# EAGLE board PCB_Proiect_v283 (EAGLE 9.7.0)
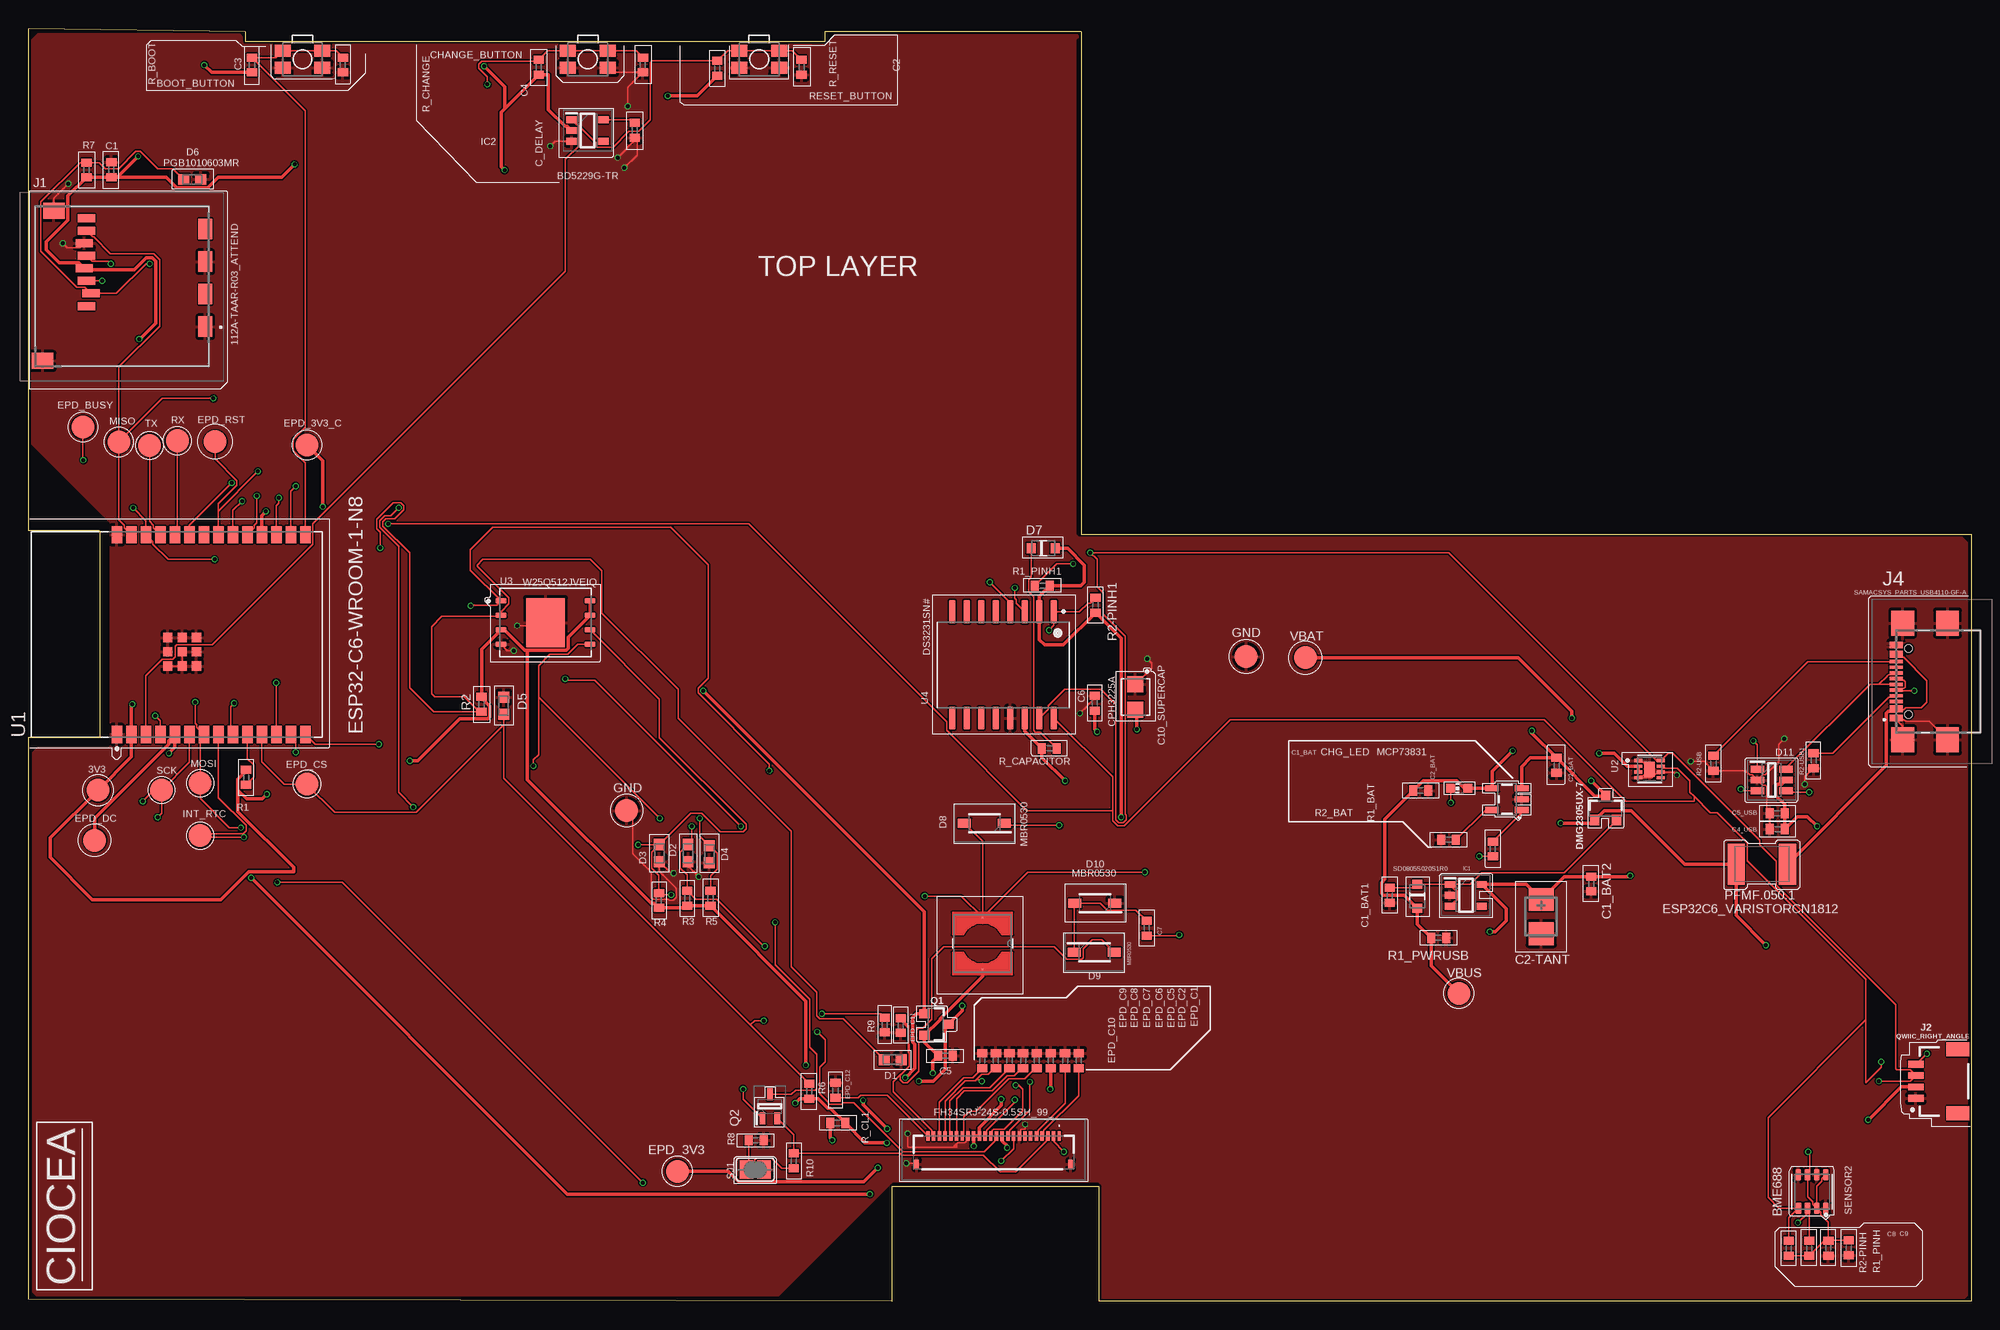
[diagram p0: board, top side]
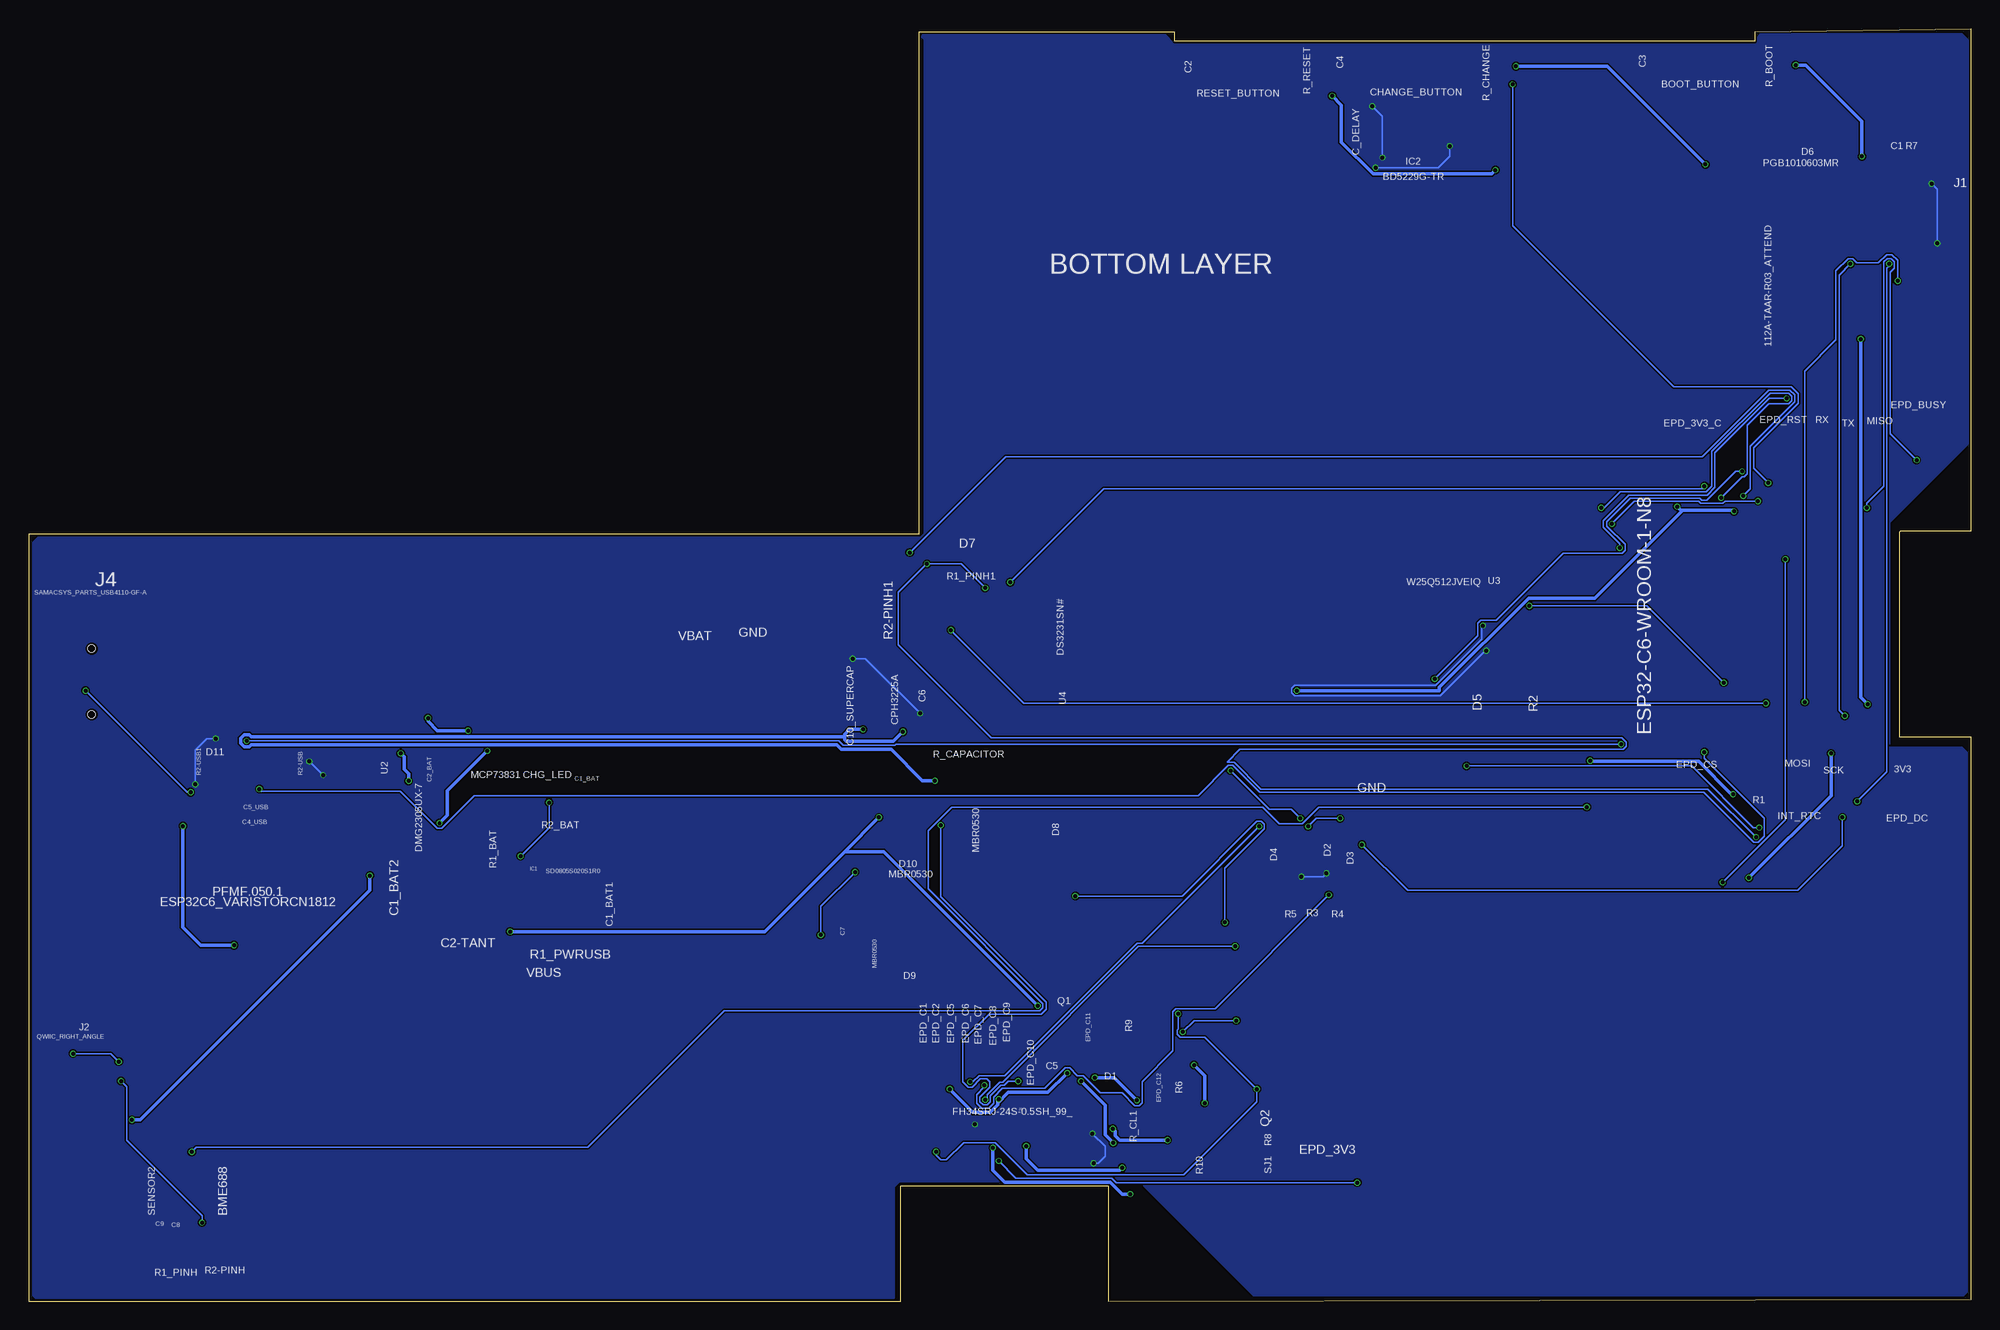
[diagram p1: board, bottom side, seen from below]

Size 170.2 x 111.5 mm. Coordinates in mm from the lower left corner, seen from the top.
Outline: 92.2,111.2 69.8,111.2 69.8,110.4 19,110.4 19,111.2 0,111.5 0,67.5 6.2,67.5 6.3,67.4 6.3,49.4 0,49.4 0,0.2 75.6,0 75.6,10.1 93.8,10.1 93.8,0 170.2,0 170.2,67.2 92.2,67.2 92.2,111.2
Copper layers (1*16): Top 0.035mm / dielectric 1.6mm / Bottom 0.035mm
Design rules "jlcpcb-2layers.dru": minimum track width 5mil, minimum drill 0.3mm, track to track 5mil, track to pad 5mil, pad to pad 5mil, via to via 5mil, smd to smd 5mil, copper to edge 0.2mm, drill to drill 6mil, minimum pad ring 10mil, minimum via ring 3mil, stop-mask expansion 4mil, vias tented up to drill 0mil, thermal gap 10mil

## Footprints (pad centres in the part's own frame; a part is rotated, then mirrored left to right if it is on the bottom)
MYBUTTON = smd 1.4 x 1.05: 1 1.75,0.75; 2 -1.75,0.75; 3 -1.75,-0.75; 4 1.75,-0.75
EAGLE-LTSPICE_C0402 = smd 0.7 x 0.9: 1 -0.65,0; 2 0.65,0
RCL_CT3528 = smd 2 x 2.2: + -1.5,0; - 1.5,0
CAPCP3225X100N = smd 1.4 x 1.4: 1 -1.1,0; 2 1.1,0
ADAFRUIT_CHIP-LED0603 = smd 0.8 x 0.8: A 0,-0.75; C 0,0.75
DIOC1608X36N = smd 0.97 x 0.94: 1 -0.75,0; 2 0.75,0
ESP32_WROVER_AVX---SD0805S020S1R0_AVX_SD0805S020S1R0_0 = smd 0.8 x 0.9: 1 -1.05,0; 2 1.05,0
SOD3716X135N = smd 1.15 x 0.8: 1 -1.75,0; 2 1.75,0
SOT95P280X145-6N = smd 1.2 x 0.6: 1 -1.25,0.95; 2 -1.25,0; 3 -1.25,-0.95; 4 1.25,-0.95; 5 1.25,0; 6 1.25,0.95
ESP32_WROVER_SPARKFUN-DISCRETESEMI_SOT23-3 = smd 0.8 x 0.9: 1 -0.95,-1; 2 0.95,-1; 3 0,1.1
SOT95P280X120-5N = smd 0.9 x 0.6: 1 -1.4,0.95; 2 -1.4,0; 3 -1.4,-0.95; 4 1.4,-0.95; 5 1.4,0.95
SOT95P280X125-5N = smd 0.9 x 0.6: 1 -1.4,0.95; 2 -1.4,0; 3 -1.4,-0.95; 4 1.4,-0.95; 5 1.4,0.95
112ATAARR03ATTEND = smd 1.8 x 1.2: G1 10.6,10.4; G2 4.9,10.4; S1 7.75,10.4; S2 2.05,10.4 | smd 1.4 x 1.9: G3 13.6,-3.85; G4 0.45,-2.85 | smd 0.7 x 1.5: P1 8.8,0; P2 7.7,0.4; P3 6.6,0; P4 5.5,-0.2; P5 4.4,0; P6 3.3,-0.2; P7 2.2,0; P8 1.1,0
JST04_1MM_RA = smd 0.6 x 1.35: 1 -1.5,0; 2 -0.5,0; 3 0.5,0; 4 1.5,0 | smd 1.2 x 2: NC1 2.8,-3.675; NC2 -2.8,-3.675
FH34SRJ24S05SH99 = smd 0.3 x 0.8: 1 5.75,1.45; 2 5.25,1.45; 3 4.75,1.45; 4 4.25,1.45; 5 3.75,1.45; 6 3.25,1.45; 7 2.75,1.45; 8 2.25,1.45; 9 1.75,1.45; 10 1.25,1.45; 11 0.75,1.45; 12 0.25,1.45; 13 -0.25,1.45; 14 -0.75,1.45; 15 -1.25,1.45; 16 -1.75,1.45; 17 -2.25,1.45; 18 -2.75,1.45; 19 -3.25,1.45; 20 -3.75,1.45; 21 -4.25,1.45; 22 -4.75,1.45; 23 -5.25,1.45; 24 -5.75,1.45 | smd 0.4 x 0.8: MP1 6.75,-1.05; MP2 -6.75,-1.05
SAMACSYS_PARTS_USB4110GFA = smd 0.3 x 1.15: A1 -3.35,3.678; A4 -2.55,3.678; A5 -1.25,3.678; A6 -0.25,3.678; A7 0.25,3.678; A8 1.25,3.678; A9 2.55,3.678; A12 3.35,3.678; B1 3.05,3.678; B4 2.25,3.678; B5 1.75,3.678; B6 0.75,3.678; B7 -0.75,3.678; B8 -1.75,3.678; B9 -2.25,3.678; B12 -3.05,3.678 | smd 2.18 x 2: MP1 -5.11,-0.827; MP2 5.11,-0.827; MP3 -5.11,3.103; MP4 5.11,3.103 | hole 0.65: -2.89,2.603; 2.89,2.603
IND_4828-WE-TPC_WRE = smd 0.127 x 0.127: 1 -2.286,0; 2 2.286,0
ESP32_WROVER_SPARKFUN-IC-POWER_SOT23-5 = smd 0.55 x 1.2: 1 -0.95,-1.3; 2 0,-1.3; 3 0.95,-1.3; 4 0.95,1.3; 5 -0.95,1.3
ESP32C6_VARISTOR_CT/CN1812 = smd 1.5 x 3.6: 1 -2.25,0; 2 2.25,0
SOT65P210X110-3N = smd 1.05 x 0.5: 1 -1.05,0.65; 2 -1.05,-0.65; 3 1.05,0
ESP32_WROVER_EAGLE-LTSPICE_R0402 = smd 0.7 x 0.9: 1 -0.65,0; 2 0.65,0
ESP32_WROVER_BME680_PSON80P300X300X100-8N = smd 1.016 x 0.5: 1 1.458,1.2; 2 1.458,0.4; 3 1.458,-0.4; 4 1.458,-1.2; 5 -1.458,-1.22; 6 -1.458,-0.4; 7 -1.458,0.4; 8 -1.458,1.2
SJ = smd 1.168 x 1.6: 1 -0.762,0; 2 0.762,0
TP20R = smd 2 x 2: TP 0,0
XCVR_ESP32-C6-WROOM-1-N8 = smd 1.5 x 0.9: 1 -8.75,5.26; 2 -8.75,3.99; 3 -8.75,2.72; 4 -8.75,1.45; 5 -8.75,0.18; 6 -8.75,-1.09; 7 -8.75,-2.36; 8 -8.75,-3.63; 9 -8.75,-4.9; 10 -8.75,-6.17; 11 -8.75,-7.44; 12 -8.75,-8.71; 13 -8.75,-9.98; 14 -8.75,-11.25; 15 8.75,-11.25; 16 8.75,-9.98; 17 8.75,-8.71; 18 8.75,-7.44; 19 8.75,-6.17; 20 8.75,-4.9; 21 8.75,-3.63; 22 8.75,-2.36; 23 8.75,-1.09; 24 8.75,0.18; 25 8.75,1.45; 26 8.75,2.72; 27 8.75,3.99; 28 8.75,5.26 | smd 0.8 x 0.8: 29_1 -2.755,0.79; 29_2 -1.505,0.79; 29_3 -0.255,0.79; 29_4 -2.755,-0.46; 29_5 -1.505,-0.46; 29_6 -0.255,-0.46; 29_7 -2.755,-1.71; 29_8 -1.505,-1.71; 29_9 -0.255,-1.71
SON50P200X200X80-9N = smd 0.76 x 0.27: 1 -0.985,0.75; 2 -0.985,0.25; 3 -0.985,-0.25; 4 -0.985,-0.75; 5 0.985,-0.75; 6 0.985,-0.25; 7 0.985,0.25; 8 0.985,0.75 | smd 0.9 x 1.3: 9 0,0
SON127P600X800X80-9N = smd 0.94 x 0.44: 1 -3.895,1.905; 2 -3.895,0.635; 3 -3.895,-0.635; 4 -3.895,-1.905; 5 3.895,-1.905; 6 3.895,-0.635; 7 3.895,0.635; 8 3.895,1.905 | smd 3.4 x 4.3: 9 0,0
SOIC127P1032X265-16N = smd 2.05 x 0.59: 1 -4.655,4.445; 2 -4.655,3.175; 3 -4.655,1.905; 4 -4.655,0.635; 5 -4.655,-0.635; 6 -4.655,-1.905; 7 -4.655,-3.175; 8 -4.655,-4.445; 9 4.655,-4.445; 10 4.655,-3.175; 11 4.655,-1.905; 12 4.655,-0.635; 13 4.655,0.635; 14 4.655,1.905; 15 4.655,3.175; 16 4.655,4.445

## Placement (x,y rotation side)
BOOT_BUTTON  BUTTON_CUSYOMV1  [MYBUTTON]  24,108.81 180 top
C1  100nF  [EAGLE-LTSPICE_C0402]  7.26,99.13 90 top
C1_BAT  4.7uF  [EAGLE-LTSPICE_C0402]  121.95,44.75 0 top
C1_BAT1  4.7uF  [EAGLE-LTSPICE_C0402]  119.25,35.57 270 top
C1_BAT2  4.7uF  [EAGLE-LTSPICE_C0402]  136.89,36.56 270 top
C2  1uF  [EAGLE-LTSPICE_C0402]  67.72,108.11 270 top
C2-TANT  100uF TANT  [RCL_CT3528]  132.51,33.7 270 top
C2_BAT  4.7uF  [EAGLE-LTSPICE_C0402]  133.86,46.95 270 top
C3  100nF  [EAGLE-LTSPICE_C0402]  27.54,108.31 270 top
C4  100nF  [EAGLE-LTSPICE_C0402]  53.82,108.31 270 top
C4_USB  100nF  [EAGLE-LTSPICE_C0402]  153.2,41.37 180 top
C5  10uF  [EAGLE-LTSPICE_C0402]  80.32,21.51 0 top
C5_USB  4.7uF  [EAGLE-LTSPICE_C0402]  153.18,42.75 180 top
C6  100nF  [EAGLE-LTSPICE_C0402]  93.4,52.41 90 top
C7  4.7uF/25V  [EAGLE-LTSPICE_C0402]  97.95,32.69 270 top
C8  100nF  [EAGLE-LTSPICE_C0402]  157.67,4.66 270 top
C9  100nF  [EAGLE-LTSPICE_C0402]  159.46,4.69 270 top
C10_SUPERCAP  CPH3225A  [CAPCP3225X100N]  96.96,52.94 270 top
C_DELAY  100nF  [EAGLE-LTSPICE_C0402]  53.11,102.59 270 top
CHANGE_BUTTON  BUTTON_CUSYOMV1  [MYBUTTON]  49,108.81 180 top
CHG_LED  [ADAFRUIT_CHIP-LED0603]  125.34,44.94 90 top
D1  PGB1010603MR  [DIOC1608X36N]  75.7,21.17 180 top
D2  PGB1010603MR  [DIOC1608X36N]  57.78,39.27 90 top
D3  PGB1010603MR  [DIOC1608X36N]  55.26,39.27 90 top
D4  PGB1010603MR  [DIOC1608X36N]  59.64,39.17 90 top
D5  PGB1010603MR  [DIOC1608X36N]  41.62,52.17 270 top
D6  PGB1010603MR  [DIOC1608X36N]  14.35,98.28 180 top
D7  SD0805S020S1R0  [ESP32_WROVER_AVX---SD0805S020S1R0_AVX_SD0805S020S1R0_0]  88.89,65.98 0 top
D8  MBR0530  [SOD3716X135N]  83.73,41.88 180 top
D9  MBR0530  [SOD3716X135N]  93.37,30.58 0 top
D10  MBR0530  [SOD3716X135N]  93.41,34.88 180 top
D11  USBLC6-2SC6Y  [SOT95P280X145-6N]  152.7,45.67 0 top
DMG2305UX-7  20V/4.2A/52mΩ/1.4W  [ESP32_WROVER_SPARKFUN-DISCRETESEMI_SOT23-3]  138.16,43.16 0 top
EPD_C1  1uF/50V  [EAGLE-LTSPICE_C0402]  91.99,21.09 90 top
EPD_C2  1uF/50V  [EAGLE-LTSPICE_C0402]  90.8,21.09 90 top
EPD_C5  0.1uF/50V  [EAGLE-LTSPICE_C0402]  89.55,21.09 90 top
EPD_C6  1uF/50V  [EAGLE-LTSPICE_C0402]  88.31,21.09 90 top
EPD_C7  1uF/50V  [EAGLE-LTSPICE_C0402]  87.12,21.09 90 top
EPD_C8  1uF/50V  [EAGLE-LTSPICE_C0402]  85.93,21.09 90 top
EPD_C9  1uF/50V  [EAGLE-LTSPICE_C0402]  84.74,21.09 90 top
EPD_C10  1uF/50V  [EAGLE-LTSPICE_C0402]  83.55,21.09 90 top
EPD_C11  1uF/50V  [EAGLE-LTSPICE_C0402]  76.41,24.17 270 top
EPD_C12  1uF/50V  [EAGLE-LTSPICE_C0402]  70.69,18.49 90 top
IC1  XC6220A331MR-G  [SOT95P280X120-5N]  125.91,35.57 0 top
IC2  BD5229G-TR  [SOT95P280X125-5N]  48.97,102.57 0 top
J1  112A-TAAR-R03_ATTEND  [112ATAARR03ATTEND]  5.08,95.99 270 top
J2  QWIIC_RIGHT_ANGLE  [JST04_1MM_RA]  165.32,19.28 90 top
J3  FH34SRJ-24S-0.5SH_99_  [FH34SRJ24S05SH99]  84.54,13.04 0 top
J4  SAMACSYS_PARTS_USB4110-GF-A  [SAMACSYS_PARTS_USB4110GFA]  167.28,54.3 90 top
L1  68uH  [IND_4828-WE-TPC_WRE]  83.57,31.35 270 top
MCP73831  ESP32_WROVER_SPARKFUN-IC-POWER_MCP73831  [ESP32_WROVER_SPARKFUN-IC-POWER_SOT23-5]  129.51,43.99 90 top
PFMF.050.1  ESP32C6_VARISTORCN1812  [ESP32C6_VARISTOR_CT/CN1812]  151.84,38.3 180 top
Q1  20V/4.2A/52mΩ/1.4W  [ESP32_WROVER_SPARKFUN-DISCRETESEMI_SOT23-3]  79.48,24.26 270 top
Q2  SI1308EDL-T1-GE3  [SOT65P210X110-3N]  64.94,17.08 90 top
R1  10K  [ESP32_WROVER_EAGLE-LTSPICE_R0402]  19.06,45.91 270 top
R1_BAT  200  [ESP32_WROVER_EAGLE-LTSPICE_R0402]  128.28,39.63 270 top
R1_PINH  10K  [ESP32_WROVER_EAGLE-LTSPICE_R0402]  155.99,4.65 270 top
R1_PINH1  10K  [ESP32_WROVER_EAGLE-LTSPICE_R0402]  88.81,62.69 0 top
R1_PWRUSB  100K  [ESP32_WROVER_EAGLE-LTSPICE_R0402]  123.52,31.84 180 top
R2  10K  [ESP32_WROVER_EAGLE-LTSPICE_R0402]  39.68,52.31 90 top
R2-PINH  10K  [ESP32_WROVER_EAGLE-LTSPICE_R0402]  154.19,4.65 270 top
R2-PINH1  10K  [ESP32_WROVER_EAGLE-LTSPICE_R0402]  93.47,60.99 90 top
R2-USB  5k1  [ESP32_WROVER_EAGLE-LTSPICE_R0402]  147.6,47.13 270 top
R2-USB1  5k1  [ESP32_WROVER_EAGLE-LTSPICE_R0402]  156.37,47.37 90 top
R2_BAT  2K  [ESP32_WROVER_EAGLE-LTSPICE_R0402]  124.39,40.43 0 top
R3  10K  [ESP32_WROVER_EAGLE-LTSPICE_R0402]  57.7,35.31 270 top
R4  10K  [ESP32_WROVER_EAGLE-LTSPICE_R0402]  55.22,35.11 270 top
R5  10K  [ESP32_WROVER_EAGLE-LTSPICE_R0402]  59.74,35.31 270 top
R6  10K  [ESP32_WROVER_EAGLE-LTSPICE_R0402]  68.39,18.41 270 top
R7  10K  [ESP32_WROVER_EAGLE-LTSPICE_R0402]  5.08,99.11 270 top
R8  2.2  [ESP32_WROVER_EAGLE-LTSPICE_R0402]  63.74,14.11 180 top
R9  10K  [ESP32_WROVER_EAGLE-LTSPICE_R0402]  75,24.21 270 top
R10  0.47  [ESP32_WROVER_EAGLE-LTSPICE_R0402]  67.04,12.31 270 top
R_BOOT  10K  [ESP32_WROVER_EAGLE-LTSPICE_R0402]  19.58,108.31 90 top
R_CAPACITOR  15  [ESP32_WROVER_EAGLE-LTSPICE_R0402]  89.42,48.44 0 top
R_CHANGE  10K  [ESP32_WROVER_EAGLE-LTSPICE_R0402]  44.69,108.11 90 top
R_CL1  10K  [ESP32_WROVER_EAGLE-LTSPICE_R0402]  70.88,15.63 180 top
R_RESET  10K  [ESP32_WROVER_EAGLE-LTSPICE_R0402]  60.33,108.01 90 top
RESET_BUTTON  BUTTON_CUSYOMV1  [MYBUTTON]  64,108.81 180 top
SD0805S020S1R0  ESP32_WROVER_AVX---SD0805S020S1R0_AVX_SD0805S020S1R0_0_0AVX_SD0805S020S1R0_0_0  [ESP32_WROVER_AVX---SD0805S020S1R0_AVX_SD0805S020S1R0_0]  121.66,35.48 270 top
SENSOR2  BME688  [ESP32_WROVER_BME680_PSON80P300X300X100-8N]  156.24,9.62 270 top
SJ1  [SJ]  63.66,11.54 180 top
TP1  TX  [TP20R]  10.61,74.99 0 top
TP2  RX  [TP20R]  13.03,75.39 0 top
TP3  VBAT  [TP20R]  111.85,56.39 0 top
TP4  GND  [TP20R]  106.67,56.49 0 top
TP5  GND  [TP20R]  52.39,42.99 0 top
TP6  MISO  [TP20R]  7.91,75.29 0 top
TP7  MOSI  [TP20R]  15.03,45.39 0 top
TP8  SCK  [TP20R]  11.65,44.79 0 top
TP9  EPD_BUSY  [TP20R]  4.77,76.59 0 top
TP10  EPD_CS  [TP20R]  24.39,45.31 0 top
TP11  EPD_DC  [TP20R]  5.79,40.39 0 top
TP12  EPD_RST  [TP20R]  16.34,75.31 0 top
TP13  EPD_3V3_C  [TP20R]  24.39,75.01 0 top
TP14  VBUS  [TP20R]  125.29,26.99 0 top
TP15  INT_RTC  [TP20R]  15.04,40.79 0 top
TP16  3V3  [TP20R]  6.09,44.79 0 top
TP17  EPD_3V3  [TP20R]  56.84,11.39 0 top
U1  ESP32-C6-WROOM-1-N8  [XCVR_ESP32-C6-WROOM-1-N8]  13,58.41 90 top
U2  MAX17048G+T10  [SON50P200X200X80-9N]  142,46.62 0 top
U3  W25Q512JVEIQ  [SON127P600X800X80-9N]  45.29,59.46 0 top
U4  DS3231SN#  [SOIC127P1032X265-16N]  85.37,55.75 270 top

## Library data of the parts
BOOT_BUTTON CHANGE_BUTTON CHG_LED PFMF.050.1 RESET_BUTTON SJ1 TP1-TP17 = DeskAssistant v19 v1
C1 C1_BAT C1_BAT1 C1_BAT2 C2 C2_BAT C3 C4 C4_USB C5 C5_USB C6-C9 C_DELAY EPD_C1 EPD_C2 EPD_C5-EPD_C12 = DeskAssistant v19 v1; SPICEMODEL: NONE; SPICEPREFIX: C
C2-TANT = DeskAssistant v19 v1; SPICEPREFIX: C
C10_SUPERCAP = DeskAssistant v19 v1; AVAILABILITY: Not in stock; CHECK_PRICES: https://www.snapeda.com/parts/CPH3225A/Seiko+Instruments/view-part/?ref=eda; DESCRIPTION: 11 mF (EDLC) Supercapacitor 3.3 V 1210 (3225 Metric) - -; MF: Seiko Instruments; MP: CPH3225A; PACKAGE: 1210 Seiko; PRICE: None; PURCHASE-URL: https://www.snapeda.com/api/url_track_click_mouser/?unipart_id=562593&manufacturer=Seiko Instruments&part_name=CPH3225A&search_term=None; SNAPEDA_LINK: https://www.snapeda.com/parts/CPH3225A/Seiko+Instruments/view-part/?ref=snap
D1-D6 = DeskAssistant v19 v1; AVAILABILITY: In Stock; CHECK_PRICES: https://www.snapeda.com/parts/PGB1010603MR/Littelfuse/view-part/?ref=eda; DESCRIPTION: 150V (Typ) Clamp - Ipp Tvs Diode Surface Mount 0603 (1608 Metric); MF: Littelfuse Inc.; MP: PGB1010603MR; PACKAGE: 0603 Littelfuse Inc.; PRICE: None; PURCHASE-URL: https://www.snapeda.com/api/url_track_click_mouser/?unipart_id=5659453&manufacturer=Littelfuse Inc.&part_name=PGB1010603MR&search_term=None; SNAPEDA_LINK: https://www.snapeda.com/parts/PGB1010603MR/Littelfuse/view-part/?ref=snap
D7 SD0805S020S1R0 = DeskAssistant v19 v1; CENTROID_NOT_SPECIFIED: No; DATASHEET: http://datasheets.avx.com/schottky.pdf; DIGIKEY_DESCRIPTION: DIODE SCHOTTKY 20V 1A 0805; DIGIKEY_PART_NUMBER: 478-7800-1-ND; LEAD_FREE: yes; MF: AVX; MOUSER_PART_NUMBER: 581-SD0805S020S1R0; PACKAGE: 0805 (2012 metric); PREFIX: D; ROHS: yes; TEMPERATURE_RANGE_HIGH: +125°C; TEMPERATURE_RANGE_LOW: -55°C
D8-D10 = DeskAssistant v19 v1; AVAILABILITY: In Stock; CHECK_PRICES: https://www.snapeda.com/parts/MBR0530/Onsemi/view-part/?ref=eda; DESCRIPTION: Diode Schottky 30 V 500mA Surface Mount SOD-123; MF: ON Semiconductor; MP: MBR0530; PACKAGE: SOD-123-2 ON Semiconductor; PRICE: None; PURCHASE-URL: https://www.snapeda.com/api/url_track_click_mouser/?unipart_id=179458&manufacturer=ON Semiconductor&part_name=MBR0530&search_term=None; SNAPEDA_LINK: https://www.snapeda.com/parts/MBR0530/Onsemi/view-part/?ref=snap
D11 = DeskAssistant v19 v1; AVAILABILITY: In Stock; CHECK_PRICES: https://www.snapeda.com/parts/USBLC6-2SC6Y/STMicroelectronics/view-part/?ref=eda; DESCRIPTION: 17V Clamp 5A (8/20µs) Ipp Tvs Diode Surface Mount SOT-23-6; MF: STMicroelectronics; MP: USBLC6-2SC6Y; PACKAGE: SOT-23-6 STMicroelectronics; PRICE: None; SNAPEDA_LINK: https://www.snapeda.com/parts/USBLC6-2SC6Y/STMicroelectronics/view-part/?ref=snap
DMG2305UX-7 Q1 = DeskAssistant v19 v1; PROD_ID: TRAN-14388
IC1 = DeskAssistant v19 v1; DESCRIPTION: LDO Voltage Regulators; HEIGHT: 1.2mm; MANUFACTURER_NAME: Torex; MANUFACTURER_PART_NUMBER: XC6220A331MR-G; MOUSER_PART_NUMBER: 865-XC6220A331MR-G; MOUSER_PRICE-STOCK: https://www.mouser.co.uk/ProductDetail/Torex-Semiconductor/XC6220A331MR-G?qs=AsjdqWjXhJ8ZSWznL1J0gg%3D%3D
IC2 = DeskAssistant v19 v1; DESCRIPTION: Voltage Detector with Adjustable Delay Time: CMOS processes are utilized to develop high precision, low current consumption CMOS reset ICs that allow arbitrary setting of the delay time. The extensive lineup includes both Nch Open Drain and CMOS output types in a wide range of detection voltages (from 2.3V to 6.0V, in 0.1V steps), enabling selection of the ideal solution based on customer requirements. In addition, the entire series is of course both lead-free and RoHS-compliant.; HEIGHT: 1.25mm; MANUFACTURER_NAME: ROHM Semiconductor; MANUFACTURER_PART_NUMBER: BD5229G-TR; MOUSER_PART_NUMBER: 755-BD5229G-TR; MOUSER_PRICE-STOCK: https://www.mouser.co.uk/ProductDetail/ROHM-Semiconductor/BD5229G-TR?qs=4kLU8WoGk0vvnhrrYwdszw%3D%3D
J1 = DeskAssistant v19 v1; DESCRIPTION: Micro SD Card Socket, Push-Push Type, Top Mount, SMT, H=1.83mm, 10u; HEIGHT: 1.9mm; MANUFACTURER_NAME: ATTEND; MANUFACTURER_PART_NUMBER: 112A-TAAR-R03 ATTEND
J2 = DeskAssistant v19 v1; PROD_ID: CONN-13694
J3 = DeskAssistant v19 v1; DESCRIPTION: 24 Position FFC, FPC Connector Contacts, Top and Bottom 0.020" (0.50mm) Surface Mount, Right Angle; HEIGHT: 1.1mm; MANUFACTURER_NAME: Hirose; MANUFACTURER_PART_NUMBER: FH34SRJ-24S-0.5SH(99); MOUSER_PART_NUMBER: 798-FH34SRJ24S05SH99; MOUSER_PRICE-STOCK: https://www.mouser.co.uk/ProductDetail/Hirose-Connector/FH34SRJ-24S-0.5SH99?qs=vcbW%252B4%252BSTIpKBl5ap9J8Fw%3D%3D
J4 = DeskAssistant v19 v1; DESCRIPTION: CONN USB 2.0 TYPE-C R/A SMT; HEIGHT: 3.26mm; MANUFACTURER_NAME: GCT (GLOBAL CONNECTOR TECHNOLOGY); MANUFACTURER_PART_NUMBER: USB4110-GF-A; MOUSER_PART_NUMBER: 640-USB4110-GF-A; MOUSER_PRICE-STOCK: https://www.mouser.co.uk/ProductDetail/GCT/USB4110-GF-A?qs=KUoIvG%2F9IlYiZvIXQjyJeA%3D%3D
L1 = DeskAssistant v19 v1; COPYRIGHT: Copyright (C) 2024 Ultra Librarian. All rights reserved.; MANUFACTURER_PART_NUMBER: 744043680; MFR_NAME: Wurth Electronics
MCP73831 = DeskAssistant v19 v1; PROD_ID: IC-09995
Q2 = DeskAssistant v19 v1; AVAILABILITY: In Stock; CHECK_PRICES: https://www.snapeda.com/parts/SI1308EDL-T1-GE3/Vishay+Siliconix/view-part/?ref=eda; DESCRIPTION: Si1308EDL-T1-GE3 N-channel MOSFET Transistor, 1.5 A, 30 V, 3-Pin SC-70 | Siliconix / Vishay SI1308EDL-T1-GE3; MF: Vishay Siliconix; MP: SI1308EDL-T1-GE3; PACKAGE: SOT-323 Vishay Semiconductor; PRICE: None; PURCHASE-URL: https://www.snapeda.com/api/url_track_click_mouser/?unipart_id=274603&manufacturer=Vishay Siliconix&part_name=SI1308EDL-T1-GE3&search_term=None; SNAPEDA_LINK: https://www.snapeda.com/parts/SI1308EDL-T1-GE3/Vishay+Siliconix/view-part/?ref=snap
R1 R1_BAT R1_PINH R1_PINH1 R1_PWRUSB R2 R2-PINH R2-PINH1 R2-USB R2-USB1 R2_BAT R3-R10 R_BOOT R_CAPACITOR R_CHANGE R_CL1 R_RESET = DeskAssistant v19 v1; SPICEMODEL: NONE; SPICEPREFIX: R
SENSOR2 = DeskAssistant v19 v1; AVAILABILITY: Unavailable; DESCRIPTION: Integrated Environmental Unit; MF: Bosch Sensortec; MP: BME680; PACKAGE: LGA-8 Bosch Tools; PRICE: None
U1 = DeskAssistant v19 v1; AVAILABILITY: In Stock; CHECK_PRICES: https://www.snapeda.com/parts/ESP32-C6-WROOM-1-N8/Espressif+Systems/view-part/?ref=eda; DESCRIPTION: Multiprotocol Modules ESP32-C6 module, Wi-Fi 6 in 2.4 GHz band, Bluetooth 5, Zigbee 3.0 and Thread. ESP34-WROOM Compatible - ENGINEERING SAMPLE; MF: Espressif Systems; MP: ESP32-C6-WROOM-1-N8; PACKAGE: None; PRICE: None; SNAPEDA_LINK: https://www.snapeda.com/parts/ESP32-C6-WROOM-1-N8/Espressif+Systems/view-part/?ref=snap
U2 = DeskAssistant v19 v1; AVAILABILITY: In Stock; CHECK_PRICES: https://www.snapeda.com/parts/MAX17048G+T10/Analog+Devices/view-part/?ref=eda; DESCRIPTION: 3µA 1-Cell/2-Cell Fuel Gauge with ModelGauge; MF: Analog Devices; MP: MAX17048G+T10; PACKAGE: TDFN-8 Maxim; PRICE: None; PURCHASE-URL: https://www.snapeda.com/api/url_track_click_mouser/?unipart_id=329239&manufacturer=Analog Devices&part_name=MAX17048G+T10&search_term=None; SNAPEDA_LINK: https://www.snapeda.com/parts/MAX17048G+T10/Analog+Devices/view-part/?ref=snap
U3 = DeskAssistant v19 v1; AVAILABILITY: In Stock; CHECK_PRICES: https://www.snapeda.com/parts/W25Q512JVEIQ/Winbond+Electronics/view-part/?ref=eda; DESCRIPTION: FLASH - NOR Memory IC 512Mb (64M x 8) SPI - Quad I/O 133 MHz 8-WSON (8x6); MF: Winbond Electronics; MP: W25Q512JVEIQ; PACKAGE: Package; PRICE: None; SNAPEDA_LINK: https://www.snapeda.com/parts/W25Q512JVEIQ/Winbond+Electronics/view-part/?ref=snap
U4 = DeskAssistant v19 v1; AVAILABILITY: In Stock; CHECK_PRICES: https://www.snapeda.com/parts/DS3231SN%23/Analog+Devices/view-part/?ref=eda; DESCRIPTION: Extremely Accurate I²C-Integrated RTC/TCXO/Crystal; MF: Analog Devices; MP: DS3231SN#; PACKAGE: SOIC-16 Maxim; PRICE: None; PURCHASE-URL: https://www.snapeda.com/api/url_track_click_mouser/?unipart_id=99048&manufacturer=Analog Devices&part_name=DS3231SN#&search_term=None; SNAPEDA_LINK: https://www.snapeda.com/parts/DS3231SN%23/Analog+Devices/view-part/?ref=snap

## Nets
3V3: C1.1 C1_BAT2.1 C2-TANT.+ D7.2 IC1.5 IC2.2 J1.P4 J2.2 Q1.3 R1.1 R1_PINH1.2 R2-PINH1.1 R2.2 R3.2 R4.2 R5.2 R6.2 R7.2 R_BOOT.1 R_CHANGE.1 R_CL1.1 R_RESET.1 TP16.TP U1.2 U3.3 U3.7 U3.8 U4.2
32KHZ: R2-PINH1.2 U1.9 U4.1
DN: D11.4 J4.A7 J4.B7
DP: D11.6 J4.A6 J4.B6
EPD_3V3: C5.1 EPD_C5.1 J3.15 J3.16 L1.2 Q1.2 TP17.TP
EPD_3V3_C: Q1.1 R_CL1.2 TP13.TP U1.18
EPD_BUSY: J3.9 TP9.TP U1.26
EPD_CS: D5.2 J3.12 R6.1 TP10.TP U1.11
EPD_DC: J3.11 TP11.TP U1.5
EPD_RST: J3.10 TP12.TP U1.21
FLASH_CS: D4.2 R5.1 U1.12 U3.1
GDR: J3.2 Q2.1 R9.1
GND: BOOT_BUTTON.1 BOOT_BUTTON.2 C1.2 C1_BAT1.2 C1_BAT2.2 C1_BAT.2 C2-TANT.- C2.2 C2_BAT.2 C3.2 C4.2 C4_USB.2 C5.2 C5_USB.2 C6.2 C8.2 C9.2 C10_SUPERCAP.1 C_DELAY.2 CHANGE_BUTTON.1 CHANGE_BUTTON.2 D1.1 D2.1 D3.1 D4.1 D5.1 D6.1 D10.1 D11.2 EPD_C1.2 EPD_C2.2 EPD_C5.2 EPD_C6.2 EPD_C7.2 EPD_C8.2 EPD_C9.2 EPD_C10.2 EPD_C11.2 EPD_C12.2 IC1.2 IC2.3 J1.G1 J1.G2 J1.G3 J1.G4 J1.P6 J2.1 J3.8 J3.17 J3.MP1 J3.MP2 J4.A1 J4.A12 J4.B1 J4.B12 J4.MP1 J4.MP2 J4.MP3 J4.MP4 MCP73831.2 R1_PWRUSB.1 R2-USB1.1 R2-USB.2 R2_BAT.1 R8.1 R9.2 RESET_BUTTON.1 RESET_BUTTON.2 SENSOR2.1 SENSOR2.5 SENSOR2.7 SJ1.1 TP4.TP TP5.TP U1.1 U1.28 U1.29_1 U1.29_2 U1.29_3 U1.29_4 U1.29_5 U1.29_6 U1.29_7 U1.29_8 U1.29_9 U2.1 U2.4 U2.6 U2.9 U3.4 U3.9 U4.13
GPIO8: R1.2 U1.10
I2C_PW: C8.1 C9.1 R1_PINH.2 R2-PINH.2 SENSOR2.2 SENSOR2.6 SENSOR2.8 U1.17
INT_RTC: R1_PINH1.1 TP15.TP U1.8 U4.3
IO/BOOT: BOOT_BUTTON.3 BOOT_BUTTON.4 C3.1 R_BOOT.2 U1.15
IO/CHANGE: C4.1 CHANGE_BUTTON.3 CHANGE_BUTTON.4 R_CHANGE.2 U1.23
MISO: D1.2 J1.P7 R2.1 TP6.TP U1.27 U3.2
MOSI: D2.2 J1.P3 J3.14 R3.1 TP7.TP U1.7 U3.5
N$1: CHG_LED.C R1_BAT.2
N$2: D7.1 R_CAPACITOR.2
N$3: C_DELAY.1 IC2.5
N$4: C1_BAT1.1 DMG2305UX-7.2 IC1.1 IC1.3 SD0805S020S1R0.1
N$5: MCP73831.5 R2_BAT.2
N$6: MCP73831.1 R1_BAT.1
N$7: EPD_C12.1 J3.24
N$8: EPD_C7.1 J3.19
N$9: EPD_C1.1 J3.4
N$10: EPD_C2.1 J3.5
N$11: EPD_C10.1 J3.22
N$12: EPD_C8.1 J3.20
N$14: C7.1 D9.1 D10.2
N$15: J4.B5 R2-USB.1
N$17: J4.A5 R2-USB1.2
N$19: EPD_C6.1 J3.18
PREVGH: D8.1 EPD_C9.1 J3.21
PREVGL: D9.2 EPD_C11.1 J3.23
RESE: J3.3 Q2.2 R10.1
RESE': R8.2 R10.2 SJ1.2
RESET: C2.1 IC2.1 R_RESET.2 RESET_BUTTON.3 RESET_BUTTON.4 U1.3
RTC_RST: U1.16 U4.4
RX: TP2.TP U1.24
SCK: D3.2 J1.P5 J3.13 R4.1 TP8.TP U1.6 U3.6
SCL: J2.4 R2-PINH.1 SENSOR2.4 U1.20 U2.7 U4.16
SDA: J2.3 R1_PINH.1 SENSOR2.3 U1.19 U2.8 U4.15
SRC: C7.2 D8.2 L1.1 Q2.3
SS_SD: D6.2 J1.P2 R7.1 U1.4
TX: TP1.TP U1.25
USB_D+: D11.1 U1.14
USB_D-: D11.3 U1.13
VBAT: C2_BAT.1 DMG2305UX-7.3 MCP73831.3 TP3.TP U2.2 U2.3
VBUS: C1_BAT.1 C4_USB.1 C5_USB.1 CHG_LED.A D11.5 DMG2305UX-7.1 MCP73831.4 PFMF.050.1.2 R1_PWRUSB.2 SD0805S020S1R0.2 TP14.TP
VRTC: C6.1 C10_SUPERCAP.2 R_CAPACITOR.1 U4.14
VUSB: J4.A4 J4.A9 J4.B4 J4.B9 PFMF.050.1.1

## Tracks (layer width: path | path; a pad name or v marks a point on that pad's centre or on a via)
3V3  (via drill 0.35)
  Top 0.3: v140.3,37.3 140.21,37.21 C1_BAT2.1 134.52,37.21 C2-TANT.+ 131.19,36.52 IC1.5 129.44,34.39 129.44,33.34 128.5,32.4 v128,32.4 | D7.2 91.02,65.98 92.5,64.5 92.5,63 92.19,62.69 R1_PINH1.2 88.55,61.77 U4.2 88.55,57.95 89,57.5 90.63,57.5 R2-PINH1.1 95.7,58.11 v95.7,42.4 | U3.8 U3.7 47.27,58.18 47.27,57.2 47.1,57.03 43.7,57.03 | v9.1,52.3 9.01,52.21 U1.2 9.01,47.71 TP16.TP 1.9,40.6 1.9,38.9 5.6,35.2 16.85,35.2 19.28,37.63 23.23,37.63 23.23,38.01 18.33,42.91 18.33,44.79 | R7.2 7.24,98.46 C1.1 7.78,98.48 v9.6,100.3 | R_BOOT.1 16.04,107.66 v15.4,108.3 | IC2.2 47.2,102.94 47.01,102.94 45.54,104.41 45.54,107.46 R_CHANGE.1 41.7,104.47 | R_RESET.1 58.57,105.6 v56,105.6 | v41.7,99.1 41.4,99.4 41.4,104.17 41.7,104.47 | v81.8,25.9 81.8,25.48 Q1.3 80.3,23.98 80.3,20.35 79.25,19.3 v78,19.3 | 18.33,44.79 19.09,44.03 20.49,44.03 v20.88,44.42 | 18.33,44.79 18.33,45.72 19.06,46.45 R1.1 | v68.1,20.7 68.1,26.3 R5.2 R3.2 57.5,34.46 R4.2 54.83,34.85 54.54,34.85 43.7,45.69 43.7,57.03 | R7.2 3.45,96.83 3.45,94.72 1.55,92.82 1.55,92.12 2.71,90.96 4.4,90.96 J1.P4 5,90.37 9.27,90.37 10.33,91.43 10.82,91.43 11.13,91.12 11.13,85.68 9.75,84.3 v9.7,84.3 | v23.3,99.6 22.16,98.46 16.63,98.46 15.7,97.53 13,97.53 12.07,98.46 R7.2 | v39.9,108.2 41.7,106.4 41.7,104.47 | 43.7,57.03 43.48,57.03 41.68,58.83 U3.3 39.68,57.11 R2.2 39.68,52.85 40.41,52.12 40.41,51.2 40.24,51.03 37.75,51.03 34.07,47.35 v33.4,47.35 | v75.18,13.88 75.16,13.9 73.26,13.9 R_CL1.1 70.23,16.93 70.01,16.93 69.18,17.76 R6.2 67.56,17.76 v67.17,17.37 | v161.15,15.9 161.19,15.9 164.07,18.78 J2.2
  Bottom 0.3: v140.3,37.3 140.3,36 160.4,15.9 v161.15,15.9 | v9.1,52.3 9.7,52.9 v9.7,84.3 | v15.4,108.3 14.5,108.3 9.6,103.4 v9.6,100.3 | v128,32.4 105.7,32.4 98.7,39.4 | 98.7,39.4 v95.7,42.4 | 98.7,39.4 95.3,39.4 v81.8,25.9 | v78,19.3 75.9,17.2 75.9,14.6 v75.18,13.88 | v23.3,99.6 31.9,108.2 v39.9,108.2 | v56,105.6 55.2,104.8 55.2,101.55 52.42,98.77 42.03,98.77 v41.7,99.1 | v33.4,47.35 33.35,47.3 23.9,47.3 21.02,44.42 v20.88,44.42 | v68.1,20.7 67.17,19.77 v67.17,17.37
32KHZ  (via drill 0.35)
  Top 0.152: v89.4,58.8 89.81,59.22 U4.1 92.05,60.41 92.82,61.17 93,61.17 R2-PINH1.2 | v18,52.4 17.7,52.1 17.7,49.86 U1.9
  Bottom 0.152: v89.4,58.8 83,52.4 v18,52.4
DN  (via drill 0.35)
  Top 0.152: J4.A7 163.75,54.4 164.26,54.4 164.38,54.28 164.38,53.82 164.26,53.7 163.75,53.7 J4.B7 163.65,53.5 v165.2,53.5 | v156,44.6 154.07,44.6 D11.4
  Bottom 0.152: v165.2,53.5 156.3,44.6 v156,44.6
DP
  Top 0.152: J4.A6 162.1,54.05 | 162.1,54.05 161.31,54.05 153.95,46.69 D11.6 | J4.B6 163.46,54.9 162.94,54.9 162.82,54.78 162.82,54.77 162.1,54.05
EPD_3V3  (via drill 0.35)
  Top 0.3: v79.2,20 79.2,21.04 C5.1 78.48,22.7 Q1.2 79.85,24.68 79.85,24.77 83.57,28.49 L1.2 | EPD_C5.1 89.55,18.65 v89.5,18.6 | TP17.TP 61.27,11.39 62.2,10.46 73.16,10.46 v74.4,11.7 | v82.8,13.6 v82.79,13.61 J3.16 J3.15 83.26,14.52 83.26,15.23 85.21,17.18 v85.21,17.7
  Bottom 0.3: v79.2,20 80.9,18.3 84.37,18.3 85.31,17.36 | 85.31,17.36 85.31,17.22 85.95,16.59 87.48,16.59 v89.5,18.6 | v85.21,17.7 85.31,17.6 85.31,17.36 | v82.8,13.6 82.8,12.5 81.8,11.5 77.63,11.5 77.63,11.47 76.37,11.47 76.37,11.5 74.6,11.5 v74.4,11.7
EPD_3V3_C  (via drill 0.35)
  Top 0.152: 76.82,19.6 v76.8,19.6
  Top 0.3: v20.8,69.2 20.44,68.84 U1.18 | TP13.TP 25.78,73.62 v25.78,69.62 | 76.82,19.6 77.64,20.42 77.64,22.51 77.47,22.68 77.47,24.9 77.78,25.21 Q1.1 78.48,34.12 v59.1,53.5 | v73.1,17.6 73.1,17.24 v75.22,15.12 | v70.42,14.12 70.23,14.31 R_CL1.2
  Bottom 0.3: v20.8,69.2 20.9,69.3 25.3,69.3 | v25.78,69.62 25.46,69.3 25.3,69.3 | v76.8,19.6 75.1,19.6 v73.1,17.6 | 25.3,69.3 33,61.6 38.8,61.6 46.6,53.8 46.6,53.5 v59.1,53.5 | v75.22,15.12 75,14.9 75,14.5 74.62,14.12 v70.42,14.12
EPD_BUSY  (via drill 0.35)
  Top 0.152: TP9.TP 4.77,73.73 v4.8,73.7 | v9.17,69.5 10.28,68.39 U1.26 10.9,66.54 10.9,66.33 12.22,65 v16.3,65 | v21.8,36.7 27.5,36.7 v53.8,10.4 | v85.2,12.3 86.29,13.39 J3.9
  Bottom 0.152: v4.8,73.7 7.12,76.02 7.12,90.14 6.75,90.51 6.75,91.08 7.02,91.35 7.39,91.35 7.68,91.06 7.68,71.42 9.17,69.93 v9.17,69.5 | v16.3,65 16.3,42.2 v21.8,36.7 | v53.8,10.4 74.91,10.4 75.31,10.8 83.7,10.8 v85.2,12.3
EPD_CS  (via drill 0.35)
  Top 0.152: U1.11 20.44,47.26 22.39,45.31 TP10.TP 24.39,45.27 26.81,42.85 33.95,42.85 41.62,50.52 D5.2 41.62,45.83 63.22,24.22 | 63.22,24.22 R6.1 | J3.12 84.64,14.34 84.64,14.01 83.74,13.1 76.6,13.1 72.3,17.4 71.34,17.4 71.22,17.29 70.16,17.29 70.04,17.41 70.04,17.46 69.3,18.2 69.3,18.49 69.32,18.51 69.32,20.52 69.8,21 69.8,22.9 v69.1,23.6 | v64.4,24.6 63.6,24.6 63.22,24.22
  Bottom 0.152: v69.1,23.6 68.1,24.6 v64.4,24.6
EPD_DC  (via drill 0.35)
  Top 0.3: TP11.TP 5.79,42.31 12.28,48.8 12.28,49.12 U1.5 12.82,48.52 v12.3,48 | v19.5,37.1 47.2,9.4 v73.7,9.4 | J3.11 85.29,14.05 85.72,13.62 v85.72,13.46
  Bottom 0.3: v12.3,48 12.3,44.3 v19.5,37.1 | v73.7,9.4 74.41,9.4 75.45,10.45 84.7,10.45 85.73,11.48 v85.73,13.45 v85.72,13.46
EPD_RST  (via drill 0.35)
  Top 0.152: J3.10 85.94,14.64 85.94,14.97 87.7,16.74 87.7,19.21 v87.72,19.23 | v62.4,41.6 49.6,54.4 47.14,54.4 v47.02,54.52 | v20.1,72.7 16.63,69.23 U1.21 16.63,69.89 18.25,71.51 18.25,71.89 16.34,73.8 TP12.TP
  Bottom 0.152: v47.02,54.52 43.25,58.29 43.25,59.39 42.99,59.65 41.65,59.65 35.75,65.55 30.61,65.55 30.35,65.81 30.35,66.3 31.95,67.91 31.95,68.29 29.89,70.35 23.79,70.35 23.62,70.19 23.18,70.19 20.67,72.7 v20.1,72.7 | v62.4,41.6 72.62,31.38 73.09,31.38 84.7,19.76 86.93,19.76 87.47,19.23 v87.72,19.23
FLASH_CS  (via drill 0.35)
  Top 0.152: R5.1 59.74,37.28 60.31,37.85 60.31,39.25 D4.2 58.8,40.76 v58.8,42.3 | U1.12 v21.71,54.19 v21.7,54.2 | v38.73,60.93 38.8,61 41.03,61 U3.1 38.7,64.06 38.7,65.86 40.66,67.82 56.28,67.82 59.55,64.55 59.55,54.6 58.65,53.69 58.65,53.31 64.9,47.06 v64.9,46.5
  Bottom 0.152: v64.9,46.5 61.5,43.1 59.6,43.1 v58.8,42.3 | v21.7,54.2 28.43,60.93 v38.73,60.93
GDR  (via drill 0.35)
  Top 0.152: Q2.1 62.6,17.72 v62.6,18.6 | v69.5,25.2 74.66,25.2 R9.1 | v90.7,13.1 89.79,14.01 J3.2
  Bottom 0.152: v90.7,13.1 90.7,12.8 90.3,12.4 89.8,12.4 88.28,13.92 85.53,13.92 82.7,11.08 69.02,11.08 62.6,17.5 v62.6,18.6 63.95,19.95 67.15,23.15 69.29,23.15 69.55,23.41 69.55,23.79 69.5,23.84 v69.5,25.2
GND  (via drill 0.35)
  Top 0.152: U2.1 141.18,47.21 141.46,47.21 141.6,47.07 141.6,46.17 141.46,46.03 141.18,46.03 U2.4 142.2,45.87 142.54,46.21 142.82,46.21 U2.6 144.13,46.37 v144.4,46.1 | D11.2 151,46.12 150.77,46.12 150.4,46.48 R2-USB.2 146.78,47.3 v145.6,47.3 | J4.A1 164.29,50.95 164.43,50.81 166.49,50.81 J4.MP1 | J4.A1 164.18,50.38 J4.MP3 | U3.4 41.95,57 v42.5,57 | v42.8,59.2 45.03,59.2 U3.9 | v42.5,57 | J1.G4 2.23,96.63 v3.5,97.9 | v3,92.7 3.41,92.29 4.48,92.29 J1.P6 | U1.29_5 U1.29_4 U1.29_1 | J4.B12 J4.A1 | TP5.TP 52.95,42.43 52.95,39.2 54.57,37.58 54.57,35.33 54.69,35.21 56.05,35.21 56.11,35.15 56.49,35.15 56.75,35.41 56.75,36.18 55.26,37.67 D3.1 56.28,37.5 v56.5,37.5 | v52.2,99.3 53.31,100.41 53.31,101.74 C_DELAY.2 53.11,101.71 v51.6,100.2 | v45.7,101.2 46.12,101.62 IC2.3 | CHANGE_BUTTON.2 51.15,107.66 C4.2 52.5,106.34 v52.5,104.7 | D11.2 151.9,45.22 152.13,45.22 152.25,45.1 152.25,43.03 C5_USB.2 152.53,41.39 C4_USB.2 | D11.2 151.9,46.12 152.13,46.12 153.3,47.28 153.3,48.8 v153.8,49.3 | v155.6,45.3 155.6,45.95 R2-USB1.1 | v98,56.3 98.4,55.9 98.4,55.48 C10_SUPERCAP.1 | v92.1,51.5 92.75,52.15 92.75,52.19 93.4,52.84 C6.2 | v58.7,37.2 57.78,38.12 D2.1 | J3.17 82.14,14.34 82.14,14.01 82.02,13.89 81.39,13.89 81.3,13.8 | 81.3,13.8 81.1,13.6 | 81.3,13.8 81.3,13.5 77,13.5 v77,14.7 | v76.9,12.1 77.79,12.1 J3.MP2 | J3.8 86.94,14.49 86.94,15.09 87.3,15.09 v87.3,15.5
  Bottom 0.152: v42.8,59.2 42.9,59.1 42.9,58 46.95,53.95 59.29,53.95 59.55,53.69 59.55,53.31 59.29,53.05 46.55,53.05 42.6,57 v42.5,57 | v3.5,97.9 3,97.4 v3,92.7 | v52.2,99.3 46.7,99.3 45.7,100.3 v45.7,101.2 | v144.4,46.1 v145.6,47.3 | v52.5,104.7 51.6,103.8 v51.6,100.2 | v153.8,49.3 154.6,49.3 155.6,48.3 v155.6,45.3 | v92.1,51.5 96.9,56.3 v98,56.3 | v56.5,37.5 56.8,37.2 v58.7,37.2 | v77,14.7 75.9,13.6 75.9,12.7 76.5,12.1 v76.9,12.1
  pour Top: 93.96,10.24 93.98,10.22 93.98,0.28 169.57,0.28 169.82,0.53 169.82,66.47 169.37,66.92 91.98,66.92 91.96,66.94 91.74,67.16 91.72,67.18 91.72,110.52 91.74,110.54 91.99,110.8 91.77,111.02 70.73,111.02 69.84,110.14 69.82,110.12 18.88,110.12 18.86,110.14 18.84,110.16 18.82,110.18 18.82,110.67 18.47,111.02 0.83,111.02 0.28,110.47 0.28,75.13 7.16,68.24 7.18,68.22 7.18,48.58 7.16,48.56 7.14,48.54 7.12,48.52 0.83,48.52 0.38,48.07 0.38,0.83 0.73,0.48 65.67,0.48 75.66,10.46 75.68,10.48 93.72,10.48 93.74,10.46
  pour Bottom: 94.36,10.04 94.38,10.02 94.38,0.28 169.57,0.28 169.82,0.53 169.82,66.47 169.37,66.92 92.08,66.92 92.06,66.94 91.74,67.26 91.72,67.28 91.72,110.52 91.74,110.54 91.99,110.8 91.77,111.02 70.73,111.02 69.84,110.14 69.82,110.12 18.98,110.12 18.96,110.14 18.84,110.26 18.82,110.28 18.82,110.67 18.47,111.02 0.83,111.02 0.28,110.47 0.28,75.13 7.16,68.24 7.18,68.22 7.18,48.83 7.26,48.74 7.28,48.72 7.28,48.68 7.26,48.66 7.14,48.54 7.12,48.52 0.83,48.52 0.38,48.07 0.38,0.83 0.73,0.48 62.87,0.48 72.86,10.46 72.88,10.48 93.92,10.48 93.94,10.46
GPIO8
  Top 0.152: U1.10 19.17,47.53 19.71,46.99 19.71,45.91 R1.2
I2C_PW  (via drill 0.35)
  Top 0.152: SENSOR2.2 156.99,7.82 156.99,7.61 157.67,6.92 C8.1 | C9.1 157.7,5.34 C8.1 | C8.1 157.3,5.31 R1_PINH.2 R2-PINH.2 | SENSOR2.2 156.29,8.51 156.29,8.72 155.84,9.17 SENSOR2.6 156.04,11.28 156.04,12.96 v155.9,13.1 | SENSOR2.8 157.09,10.73 157.09,10.52 156.64,10.07 SENSOR2.2 | U1.17 21.71,69.71 21.93,69.94 v21.93,70.39 | v33.7,43.3 32.42,44.58 32.42,66.14 30.77,67.8 30.77,68.4 31.2,68.83 31.73,68.83 v32.42,69.52
  Bottom 0.152: v155.9,13.1 155.5,13.5 121.2,13.5 109.25,25.45 81.61,25.45 81.35,25.71 81.35,26.09 91.4,36.14 91.4,41.24 89.34,43.3 62.09,43.3 60.64,41.85 58.61,41.85 57.16,43.3 v33.7,43.3 | v32.42,69.52 32.17,69.52 30.78,70.91 23.25,70.91 22.75,71.41 22.75,74.45 17.64,79.55 16.01,79.55 15.75,79.29 15.75,78.91 16.01,78.65 17.76,78.65 19.65,76.76 19.65,72.51 19.91,72.25 20.08,72.25 v21.93,70.39
INT_RTC  (via drill 0.35)
  Top 0.152: v91.5,64.6 90.07,64.6 R1_PINH1.1 | v86.4,62.5 86.4,61.57 86.5,61.47 86.5,61.18 U4.3 | v18.87,40.67 15.16,40.67 TP15.TP 15.2,40.95 18.79,40.95 19.05,41.21 19.05,41.69 16.63,44.11 U1.8
  Bottom 0.152: v86.4,62.5 88.5,64.6 v91.5,64.6 94,62.1 94,57.5 85.88,49.38 30.64,49.38 30.25,48.99 30.25,48.61 30.51,48.35 64.09,48.35 65.2,47.23 64.6,47.23 62.24,44.88 23.08,44.88 v18.87,40.67
IO/BOOT
  Top 0.152: C3.1 26.94,109.56 BOOT_BUTTON.3 BOOT_BUTTON.4 21.65,108.96 R_BOOT.2 24.25,104.29 24.25,76.57 23.19,75.51 23.19,74.51 24.25,73.45 U1.15
IO/CHANGE  (via drill 0.35)
  Top 0.152: C4.1 53.22,109.56 CHANGE_BUTTON.3 CHANGE_BUTTON.4 45.49,109.56 R_CHANGE.2 44.59,108.65 39.71,108.65 39.45,108.39 39.45,108.01 40.2,107.26 v40.2,106.6 | v17.8,71.7 14.09,67.99 U1.23
  Bottom 0.152: v17.8,71.7 19.09,72.99 19.09,74.78 15.19,78.68 15.19,79.52 15.78,80.11 26.08,80.11 40.2,94.23 v40.2,106.6
MISO  (via drill 0.35)
  Top 0.152: U1.27 8.39,67.78 8.39,67.99 7.91,68.48 TP6.TP | J1.P7 5.62,93.24 5.71,93.24 7.17,91.78 10.96,91.78 11.48,91.27 11.48,85.44 7.91,81.87 TP6.TP | v16.2,79.1 11.72,79.1 TP6.TP | D1.2 71.37,24.75 69.31,24.75 69.05,25.01 69.05,27.07 66.8,29.32 66.8,41.2 56.9,51.1 56.9,53.6 50.2,60.3 50.2,64 49.2,65 39.8,65 39.3,64.5 39.3,64.41 42.07,61.64 42.07,61.09 41.4,60.42 U3.2 41.3,59.99 36.22,59.99 35.33,59.11 35.33,53.24 35.6,52.97 38.17,52.97 39.48,51.66 R2.1 35.48,51.66 33.4,53.74 33.4,65.56 31.05,67.91 31.05,68.29 31.31,68.55 32.1,68.55 32.88,69.33 32.88,69.71 32.61,69.98 31.94,69.98 30.49,68.52 30.49,67.68 30.8,67.37 v30.8,66
  Bottom 0.152: v16.2,79.1 17.7,79.1 22.47,74.33 22.47,71.3 23.13,70.63 30,70.63 32.23,68.4 32.23,67.8 30.8,66.36 v30.8,66
MOSI  (via drill 0.35)
  Top 0.152: v14.6,52.5 14.6,50.64 14.74,50.49 14.74,50.28 U1.7 15.03,49.33 TP7.TP 15.03,44.07 17.6,41.5 v18.6,41.5 | J1.P3 6.46,89.39 v6.47,89.4 | J3.14 83.94,14.64 83.94,14.97 86.4,17.44 v86.4,17.67 | U3.5 48.13,57.55 47.25,56.68 45.68,56.68 44.7,55.7 44.7,52.9 | 44.7,52.9 v55.3,42.3 | v58.1,41.6 58.1,40.34 D2.2 57.11,39.35 57.11,37.95 57.7,37.36 R3.1 58.45,35.21 60.27,35.21 64.39,31.1 v64.5,31.1 | 44.7,52.9 44.7,47.9 44.23,47.43 v44.23,46.9
  Bottom 0.152: v14.6,52.5 14.6,81.5 11.88,84.22 11.88,90.26 10.79,91.35 10.41,91.35 10.04,90.98 8.16,90.98 7.44,91.7 6.97,91.7 6.47,91.2 v6.47,89.4 | v55.3,42.3 57.4,42.3 v58.1,41.6 | v18.6,41.5 19.1,41.5 24.5,46.9 v44.23,46.9 | v64.5,31.1 72.97,31.1 84.86,19.21 85.13,19.21 86.22,18.12 86.22,17.85 v86.4,17.67
N$1  (via drill 0.35)
  Top 0.152: R1_BAT.2 127.12,38.98 v127.1,39 | v124.6,43.7 v124.59,43.71 CHG_LED.C
  Bottom 0.152: v127.1,39 124.6,41.5 v124.6,43.7
N$2
  Top 0.152: R_CAPACITOR.2 88.64,49.87 88.21,49.87 88.05,50.03 88.05,61.72 87.61,62.16 87.61,63.22 87.84,63.45 D7.1
N$3
  Top 0.152: C_DELAY.1 52.83,103.52 IC2.5
N$4
  Top 0.152: C1_BAT1.1 121.35,36.22 SD0805S020S1R0.1 IC1.1 | IC1.3 124.96,35.07 125.04,35.07 125.16,35.19 125.16,35.95 125.04,36.07 124.96,36.07 IC1.1 | IC1.1 126.27,36.52 127.32,37.56 134.51,37.56 DMG2305UX-7.2
N$5
  Top 0.152: R2_BAT.2 127.65,43.04 MCP73831.5
N$6
  Top 0.152: R1_BAT.1 130.81,42.81 MCP73831.1
N$7
  Top 0.152: EPD_C12.1 72.7,17.84 72.91,18.05 75.23,18.05 J3.24
N$8
  Top 0.152: EPD_C7.1 87.02,20.44 86.36,19.78 85.75,19.78 84.42,18.45 81.98,18.45 81.29,17.76 J3.19
N$9
  Top 0.152: J3.4 88.94,14.64 88.94,14.97 91.99,18.03 EPD_C1.1
N$10
  Top 0.152: J3.5 88.44,14.64 88.44,14.97 90.8,17.34 EPD_C2.1
N$11
  Top 0.152: J3.22 79.79,17.45 81.94,19.59 82.7,19.59 EPD_C10.1
N$12
  Top 0.152: J3.20 80.69,14.59 80.69,17.56 81.87,18.73 84.22,18.73 84.59,19.11 EPD_C8.1
N$14
  Top 0.152: D9.1 91.62,34.84 D10.2 93.9,34.88 94.5,34.28 97.01,34.28 C7.1
N$15
  Top 0.152: J4.B5 155.87,56.05 R2-USB.1
N$17
  Top 0.152: J4.A5 163.46,52.9 162.94,52.9 158.06,48.02 R2-USB1.2
N$19
  Top 0.152: J3.18 81.94,14.64 81.94,16.18 82.43,16.67 83.03,16.67 85.86,19.5 87.27,19.5 88.21,20.44 EPD_C6.1
PREVGH  (via drill 0.35)
  Top 0.152: D8.1 85.66,41.7 v90.3,41.7 | 83.01,19.41 83.49,19.89 84.08,19.89 84.64,20.44 EPD_C9.1 | J3.21 80.29,17.55 82.05,19.31 82.91,19.31 83.01,19.41 | 83.01,19.41 83.38,19.41 v83.5,19.29
  Bottom 0.152: v90.3,41.7 90.3,35.44 81.07,26.2 81.07,25.6 81.5,25.17 86.04,25.17 88.35,22.85 88.35,19.22 87.89,18.75 87.55,18.75 86.82,19.48 86.24,19.48 86,19.24 86,18.76 86.85,17.9 86.85,17.48 86.59,17.22 86.21,17.22 85.95,17.48 85.95,18 85.02,18.93 84.74,18.93 84.39,19.29 v83.5,19.29
PREVGL
  Top 0.152: J3.23 79.14,14.64 79.14,14.97 75.76,18.36 75.76,19.24 77.14,20.62 77.14,21.72 77.06,21.8 77.06,23.95 76.41,24.61 EPD_C11.1 77.12,24.11 77.12,22.53 77.14,22.52 77.14,20.58 76.35,19.79 76.35,19.41 76.61,19.15 76.99,19.15 78,20.15 78,22.66 77.83,22.83 77.83,23.79 77.95,23.91 78.32,23.91 79.13,24.73 79.13,30.03 80.18,31.08 89.86,31.08 90.96,29.98 92.28,29.98 92.4,30.1 92.4,30.9 93.18,31.68 94.02,31.68 D9.2
RESE
  Top 0.152: Q2.2 67.04,14.58 R10.1 76.34,12.96 76.48,12.82 83.64,12.82 85.11,11.35 86.48,11.35 89.14,14.01 89.14,14.34 J3.3
RESE'
  Top 0.152: R8.2 63.09,11.73 SJ1.2 63.63,12.28 63.63,12.43 63.75,12.54 65.09,12.54 65.97,11.66 R10.2
RESET
  Top 0.152: C2.1 66.92,109.56 RESET_BUTTON.3 RESET_BUTTON.4 61.23,109.56 R_RESET.2 54.61,108.66 54.47,108.52 54.47,103.52 53.45,102.49 52.58,102.49 51.2,101.12 49.84,101.12 49.72,101.24 49.72,101.46 48.22,102.95 | U1.3 10.28,54.81 11.73,56.26 12.65,56.26 12.86,56.46 12.86,57.39 12.98,57.51 16.09,57.51 24.9,66.33 24.9,68.1 47.02,90.22 47.02,100.04 48.22,101.24 48.22,102.95 | 48.22,102.95 48.1,103.07 48.02,103.07 IC2.1
RTC_RST  (via drill 0.35)
  Top 0.152: U1.16 22.98,70.98 v23.4,71.4 | v84.2,63 86,61.2 U4.4
  Bottom 0.152: v84.2,63 76,71.2 23.6,71.2 v23.4,71.4
RX
  Top 0.152: TP2.TP 13.03,67.37 U1.24
SCK  (via drill 0.35)
  Top 0.152: TP8.TP 14.09,47.23 U1.6 | U3.6 55.26,52.75 55.26,49.38 62.85,41.79 62.85,41.41 62.59,41.15 60.6,41.15 58.99,42.75 57.99,42.75 D3.2 | D3.2 54.59,39.35 54.59,37.95 55.22,37.32 R4.1 55.38,35.6 v56.3,35.6 | TP8.TP 11.65,42.75 v11.3,42.4 | v53.4,40 55.24,40 D3.2 | TP8.TP 10.99,44.79 v10,43.8 | J1.P5 5.57,91.1 7,91.1 v7.2,90.9 | J3.13 84.44,14.64 84.44,14.97 84.56,15.09 85.49,15.09 87.1,16.7 87.1,18.59 86.75,18.94 v86.46,18.94
  Bottom 0.152: v11.3,42.4 11.3,39.9 15.2,36 49.4,36 v53.4,40 | v10,43.8 7.4,46.4 7.4,90.5 7.2,90.7 v7.2,90.9 | v56.3,35.6 66.25,25.65 69.69,25.65 69.95,25.39 69.95,21.95 72.65,19.25 72.65,17.41 72.91,17.15 73.29,17.15 74.4,18.25 76.31,18.25 77.81,19.75 78.31,19.75 79.01,20.45 79.39,20.45 81.19,18.65 84.9,18.65 85.67,17.89 85.67,17.37 86.1,16.94 86.7,16.94 87.13,17.37 87.13,18.12 86.46,18.79 v86.46,18.94
SCL  (via drill 0.35)
  Top 0.152: R2-PINH.1 154.19,7.31 SENSOR2.4 153.34,8.16 152.4,9.1 152.4,16.1 160.95,24.65 | v162.3,21 162.3,20.5 160.95,19.15 160.95,24.65 | 160.95,24.65 160.95,28.2 150.54,38.61 150.54,40.18 147.92,42.81 147.33,42.81 145.9,44.24 | U2.7 143.15,46.71 144.43,46.71 145.53,45.61 145.53,44.61 145.9,44.24 | 145.9,44.24 145.9,43.8 139.9,43.8 132.76,50.94 105.28,50.94 96,41.67 95.4,41.67 94.97,42.1 94.97,43 | U4.16 94.97,45.94 94.97,43 | 94.97,43 87.46,43 80.43,50.03 80.43,50.77 63.1,68.1 v31.5,68.1 | U1.20 17.9,69.3 v18.7,70.1 | J2.4 165.38,20.78 v166.3,21.7
  Bottom 0.152: v162.3,21 163,21.7 v166.3,21.7 | v18.7,70.1 21.58,70.1 21.77,69.91 23.73,69.91 23.9,70.07 29.53,70.07 v31.5,68.1
SDA  (via drill 0.35)
  Top 0.152: R1_PINH.1 155.99,8.01 SENSOR2.3 155.84,7.74 v155,6.9 | 165.33,19.78 164.84,20.28 163.67,20.28 163.56,20.4 163.56,26 153.1,36.45 153.1,38.55 151.66,40 151.66,40.4 144.05,48.01 143.62,48.01 U2.8 142.64,47.37 124.41,65.6 v93,65.6 93.6,65 93.6,62.6 94.12,62.07 94.12,60.19 96.05,58.26 96.05,42.69 96.15,42.59 96.15,42.21 95.89,41.95 95.51,41.95 95.25,42.21 95.25,52.3 93.93,53.61 90.77,53.61 89.32,52.16 89.32,51.87 U4.15 | 165.33,19.78 164.85,19.3 v162.1,19.3 | U1.19 19.79,67.78 19.79,67.99 20,68.21 v20,70.55 | 165.33,19.78 J2.3
  Bottom 0.152: v162.1,19.3 161.6,18.8 161.6,14.1 155,7.5 v155,6.9 | v93,65.6 84.6,74 23.59,74 17.76,79.83 15.9,79.83 15.47,79.4 15.47,78.8 19.37,74.9 19.37,71.19 v20,70.55
SRC  (via drill 0.35)
  Top 0.152: D8.2 83.57,40.29 L1.1 | Q2.3 66.83,18.13 67.21,18.51 68.92,18.51 69.04,18.63 69.04,21.66 68.45,22.25 68.45,26.45 65.4,29.5 v65.4,33.2 | v78.5,35.5 81.71,35.5 L1.1 | C7.2 100.74,32.04 v100.8,32.1 | v97.8,37.6 87.53,37.6 L1.1
  Bottom 0.152: v78.5,35.5 69.14,35.5 62.59,42.05 62.21,42.05 61.95,41.79 61.95,41.41 65.4,37.96 v65.4,33.2 | v100.8,32.1 100.8,34.6 v97.8,37.6
SS_SD  (via drill 0.35)
  Top 0.152: D6.2 12.65,99.23 11.32,99.23 9.79,100.75 9.41,100.75 7.88,99.23 6.73,99.23 6.19,99.76 R7.1 4.51,99.76 1.07,96.32 1.07,92.01 4.24,88.84 4.93,88.84 J1.P2 7.69,88.29 10.3,90.9 v10.6,90.9 | U1.4 11.55,50.85 v11.1,51.3
  Bottom 0.152: v11.1,51.3 11.6,51.8 11.6,89.9 v10.6,90.9
TX
  Top 0.152: U1.25 10.93,67.78 10.93,67.99 10.61,68.32 TP1.TP
USB_D+  (via drill 0.35)
  Top 0.152: U1.14 25.11,48.8 v30.7,48.8 | v151.1,49.1 151.45,48.75 D11.1
  Bottom 0.152: v30.7,48.8 94.2,48.8 94.3,48.7 98.85,48.7 99.25,49.1 v151.1,49.1
USB_D-  (via drill 0.35)
  Top 0.152: v23.4,48.1 23.4,49.24 U1.13 | D11.3 150.14,44.72 v149.98,44.88
  Bottom 0.152: v149.98,44.88 149.8,44.7 137.64,44.7 134.39,41.45 134.01,41.45 131.16,44.3 67.74,44.3 65.09,46.95 64.71,46.95 62.36,44.6 23.44,44.6 19.06,40.21 18.68,40.21 18.15,40.75 18.15,42.33 23.4,47.59 v23.4,48.1
VBAT  (via drill 0.35)
  Top 0.3: C2_BAT.1 137.2,44.26 DMG2305UX-7.3 138.16,44.34 v136.9,45.6 | C2_BAT.1 131.57,47.6 130.81,46.84 MCP73831.3 | U2.3 U2.2 140.03,46.87 138.9,48 v137.6,48 | TP3.TP 130.51,56.39 135.2,51.7 v135.2,51.1 | v131.7,49.98 131.7,49.76 C2_BAT.1
  Bottom 0.3: v137.6,48 137.3,47.7 137.3,46.6 136.9,46.2 v136.9,45.6 | v135.2,51.1 135.2,50.8 134.38,49.98 v131.7,49.98
VBUS  (via drill 0.35)
  Top 0.3: TP14.TP 122.87,29.41 R1_PWRUSB.2 121.66,33.05 SD0805S020S1R0.2 120.5,35.59 118.69,35.59 118.52,35.76 118.52,36.69 118.8,36.96 118.8,42.25 C1_BAT.1 122.17,45.62 125.11,45.62 125.78,44.94 CHG_LED.A MCP73831.4 128.21,46.43 v130,48.22 | v134.2,41.9 136.95,41.9 DMG2305UX-7.1 138.05,43 140.4,43 145.1,38.3 PFMF.050.1.2 149.59,33.81 v152.2,31.2 | v156.67,41.63 155.83,42.47 154.95,42.47 C4_USB.1 153.85,42.73 C5_USB.1 153.83,43.55 153.07,44.3 153.07,45.13 153.24,45.3 153.58,45.3 D11.5
  Bottom 0.3: v134.2,41.9 133.5,42.6 133.5,44.72 v130,48.22 | v152.2,31.2 155.1,31.2 156.67,32.77 v156.67,41.63
VRTC  (via drill 0.35)
  Top 0.3: U4.14 87.28,49.94 R_CAPACITOR.1 88.77,47.63 v90.8,45.6 | C6.1 93.4,50.1 v93.6,49.9 | v97.1,50.1 97.1,51.7 C10_SUPERCAP.2
  Bottom 0.3: 98.7,49.45 150.71,49.45 150.88,49.63 151.32,49.63 151.63,49.32 151.63,48.88 151.32,48.57 150.88,48.57 150.71,48.75 99.39,48.75 98.99,48.35 94.65,48.35 91.9,45.6 v90.8,45.6 | 98.7,49.45 98.7,49.2 98.55,49.05 94.45,49.05 v93.6,49.9 | v97.1,50.1 98.3,50.1 98.7,49.7 98.7,49.45
VUSB
  Top 0.152: J4.B4 J4.A9 164.05,56.4 164.26,56.4 166.3,54.37 166.3,52.5 165.81,52.01 164.43,52.01 164.09,51.68 163.6,51.68 163.53,51.68
  Top 0.3: J4.A4 163.53,51.68 162.91,51.68 162.75,51.52 162.75,46.96 PFMF.050.1.1 | J4.B9 163.6,51.68

## Text on the board
tPlace: TOP LAYER | C2_BAT | CIOCEA
bPlace: R_BOOT | R_CHANGE | R_RESET | C3 | C4 | C2 | BOOT_BUTTON | CHANGE_BUTTON | RESET_BUTTON | R7 | C1 | D6 | IC2 | C_DELAY | PGB1010603MR | J1 | BD5229G-TR | 112A-TAAR-R03_ATTEND | BOTTOM LAYER | EPD_BUSY | MISO | TX | RX | EPD_RST | EPD_3V3_C | ESP32-C6-WROOM-1-N8 | D7 | U3 | W25Q512JVEIQ | R1_PINH1 | R2-PINH1 | J4 | DS3231SN# | SAMACSYS_PARTS_USB4110-GF-A | GND | VBAT | C10_SUPERCAP | CPH3225A | C6 | R2 | D5 | U4 | R_CAPACITOR | C2_BAT | R2-USB | D11 | R2-USB1 | MOSI | EPD_CS | U2 | 3V3 | SCK | C1_BAT | CHG_LED | MCP73831 | GND | DMG2305UX-7 | R1 | MBR0530 | C5_USB | EPD_DC | INT_RTC | D8 | C4_USB | R2_BAT | R1_BAT | D2 | D4 | D3 | C1_BAT2 | D10 | SD0805S020S1R0 | IC1 | MBR0530 | C1_BAT1 | PFMF.050.1 | ESP32C6_VARISTORCN1812 | R4 | R3 | R5 | C7 | MBR0530 | C2-TANT | R1_PWRUSB | D9 | VBUS | Q1 | EPD_C9 | EPD_C8 | EPD_C7 | EPD_C6 | EPD_C5 | EPD_C2 | EPD_C1 | R9 | EPD_C11 | J2 | EPD_C10 | QWIIC_RIGHT_ANGLE | EPD_C12 | C5 | R6 | D1 | Q2 | R_CL1 | J3 | FH34SRJ-24S-0.5SH_99_ | R8 | EPD_3V3 | SJ1 | R10 | BME688 | SENSOR2 | C9 | C8 | R2-PINH | R1_PINH